# Altium PCB Nixie_Control.PcbDoc
Units mil, origin at the board's own origin, x right, y up, seen from the top; angles counter-clockwise.
Board outline 6299.21 x 1771.65 mil, 2 copper layers (Power, GND), stack 21 mil thick; 26 components, 73 nets, 202 pads, 27 vias.
Unrouted connection lines stored in the file: 13.
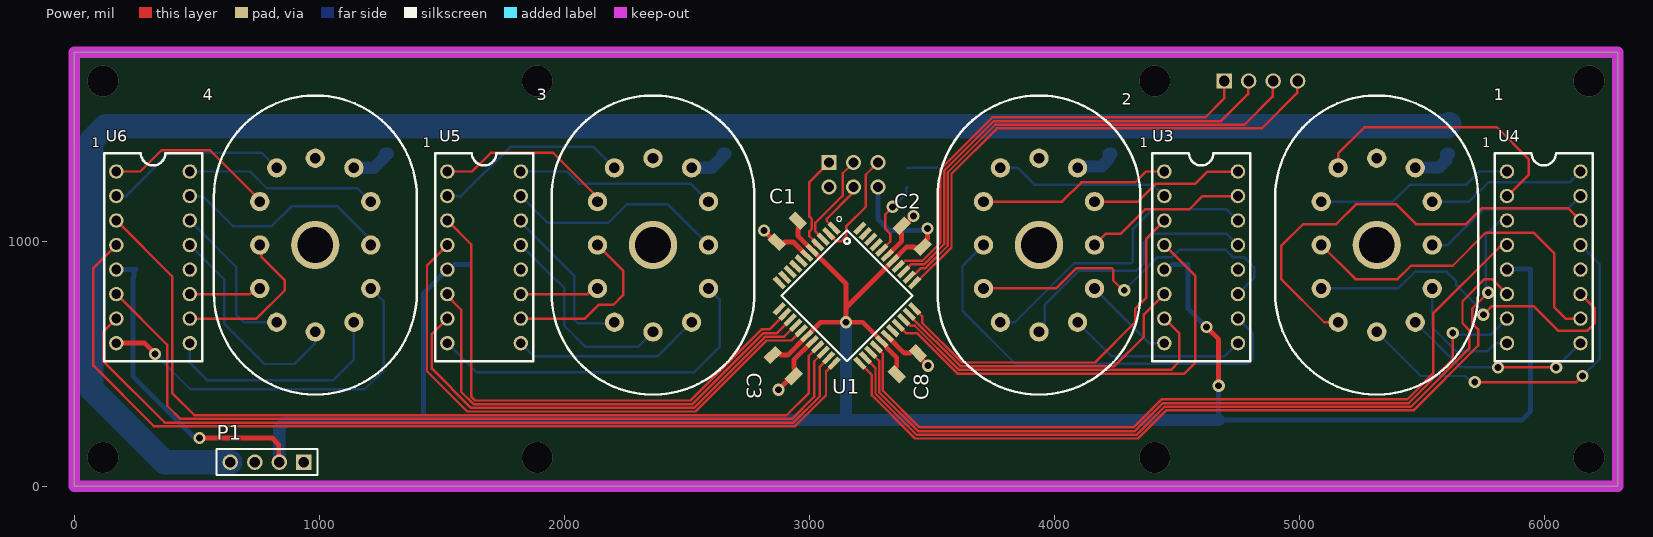
[diagram p0: Power view]
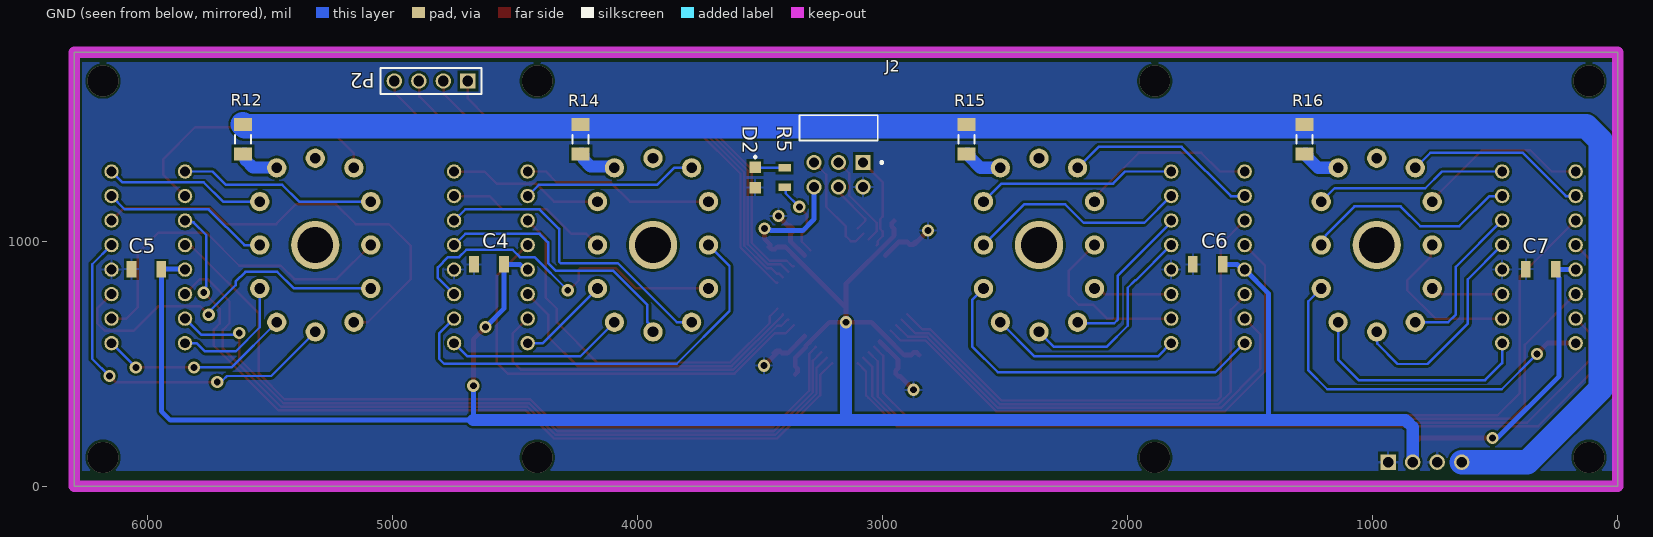
[diagram p1: GND view, seen from below]
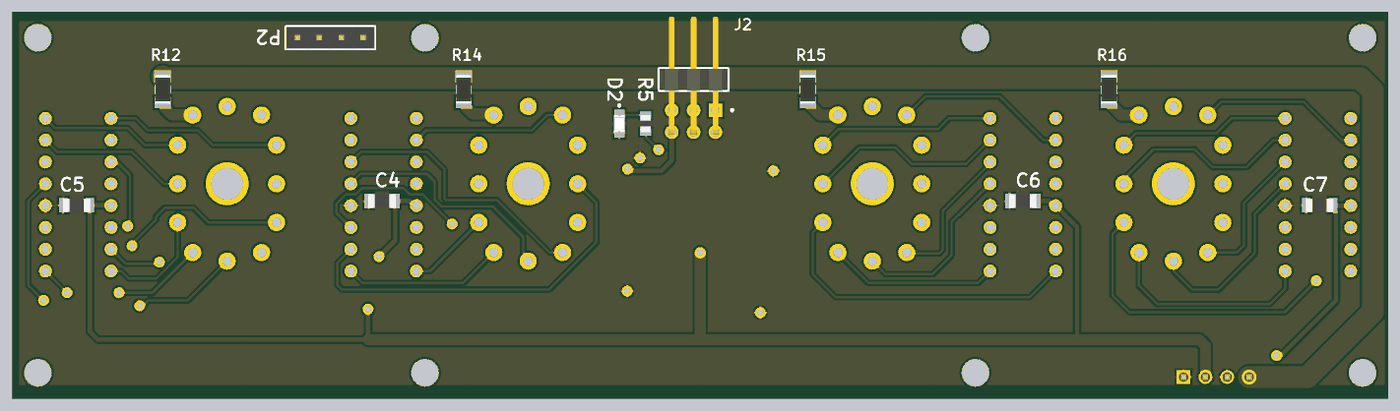
[diagram p2: 3D render of the assembled board from below, using the file's embedded part models]

## Layer stack, top to bottom
Top Solder: solder mask 0.4, Solder Resist, Dk 3.5
Power: signal copper 1.4
Dielectric 2: prepreg 2.8, PP-006, Dk 4.1
Dielectric 1: dielectric 12.6, FR-4, Dk 4.8
Dielectric 3: prepreg 2.8, PP-006, Dk 4.1
GND: signal copper 1.4
Bottom Solder: solder mask 0.4, Solder Resist, Dk 3.5

## Board outline
0,0 6299.21,0 6299.21,1771.65 0,1771.65

## Design rules (kind name [scope] priority, off if disabled: settings)
Clearance [All] p1: gap=10 ignorepadtopadclearanceinfootprint=FALSE except(0: Arc-Hole Track-Hole SMDPad-Hole THPad-Hole Via-Hole Fill-Hole Poly-Hole Region-Hole Text-Hole; 5: Arc-Arc Arc-Track Track-Track SMDPad-SMDPad; 7.87: Arc-SMDPad Arc-THPad Track-SMDPad Track-THPad; 19.68: THPad-THPad)
Height [All] p1: minheight=0 maxheight=1968.5 prefheight=500
HoleSize [All] p1: absolutevalues=TRUE maxlimit=248.03 minlimit=7.87 maxpercent=80.000 minpercent=20.000
MinimumSolderMaskSliver [All] p1: minsoldermaskwidth=5
PolygonConnect [All] p1: connectstyle=Relief reliefconductorwidth=10 reliefentries=4 polygonreliefangle="90 Angle" airgapwidth=10
RoutingVias [All] p1: holewidth=28 width=50 viastyle="Through Hole" minholewidth=28 minwidth=50 maxholewidth=28 maxwidth=50
SilkToSolderMaskClearance [IsPad] p1: minsilkscreentomaskgap=5 clearancetoexposedcopper=TRUE
SolderMaskExpansion [All] p1: expansion=1.97 istentingtop=FALSE
Width [All] p1: maxlimit=100 minlimit=10 preferedwidth=10
26 further rules are at their usual default settings.

## Classes and differential pairs
component class ATMega1284p: C1 C2 C3 C8 D2 P2 R5 U1
component class IN_12A: 1 2 3 4 C4 C5 C6 C7 R12 R14 R15 R16 U3 U4 U5 U6
component class Connectors: J2 P1

## Components (designator, comment, footprint, x,y, rotation, side; value= is the part's Value field where it differs from the comment)
1 "IN-12A" IN-12A 5314.96,984.25 r0 top locked
2 "IN-12A" IN-12A 3937.01,984.25 r0 top locked
3 "IN-12A" IN-12A 2362.2,984.25 r0 top locked
4 "IN-12A" IN-12A 984.25,984.25 r0 top locked
C1 "Capacitor - 0.1uF - 1206" FOOTPRINT-1206-GEN 2910,1040 r45 top value=0.1uF
C2 "Capacitor - 0.1uF - 1206" FOOTPRINT-1206-GEN 3420,1020 r315 top value=0.1uF
C3 "Capacitor - 0.1uF - 1206" FOOTPRINT-1206-GEN 2893.7,492.13 r135 top value=0.1uF
C4 "Capacitor - 0.1uF - 1206" FOOTPRINT-1206-GEN 4606.3,905.51 r180 bottom value=0.1uF
C5 "Capacitor - 0.1uF - 1206" FOOTPRINT-1206-GEN 6003.94,885.83 r180 bottom value=0.1uF
C6 "Capacitor - 0.1uF - 1206" FOOTPRINT-1206-GEN 1673.23,905.51 r180 bottom value=0.1uF
C7 "Capacitor - 0.1uF - 1206" FOOTPRINT-1206-GEN 314.96,885.83 r180 bottom value=0.1uF
C8 "Capacitor - 0.1uF - 1206" FOOTPRINT-1206-GEN 3400,500 r225 top value=0.1uF
D2 "LGR971-KN-1" FOOTPRINT-OSRAM-CHIPLED-0805-1A2K 3520,1260 r270 bottom
J2 "M20-9950345" FP-M20-9950345-MFG 3180,1460 r0 bottom
P1 "61300411121" 61300411121 787.4,98.43 r180 top
P2 "61300411121" 61300411121 4842.52,1653.54 r0 bottom locked
R5 "RMCF0805FT1K20" FOOTPRINT-0805-GEN 3400,1260 r270 bottom value=1.2k
R12 "Resistor 80k +/-1% 1206 250 mW" RESC3216X60X45ML15T20 5610.24,1416.34 r90 bottom value=80k
R14 "Resistor 80k +/-1% 1206 250 mW" RESC3216X60X45ML15T20 4232.28,1416.34 r90 bottom value=80k
R15 "Resistor 80k +/-1% 1206 250 mW" RESC3216X60X45ML15T20 2657.48,1416.34 r90 bottom value=80k
R16 "Resistor 80k +/-1% 1206 250 mW" RESC3216X60X45ML15T20 1279.53,1416.34 r90 bottom value=80k
U1 "ATMega-1284P" QFP80P1200X1200X120-44N 3153.7,777.32 r315 top locked
U3 "K155ID1" Socket_DIP_16 4448.82,1284.25 r0 top
U4 "K155ID1" Socket_DIP_16 5846.46,1284.25 r0 top
U5 "K155ID1" Socket_DIP_16 1523.07,1284.25 r0 top
U6 "K155ID1" Socket_DIP_16 172.44,1284.25 r0 top

## Footprints (in the part's own frame and the unit in brackets; to place one, negate y for a bottom-side part, rotate by r counter-clockwise, add the part's x,y. Pads: shape width x height; smd on the part's side, far side on the other; paste and mask are expansions set on the pad)
61300411121 [mm] "Pin Header, pitch 2.54 mm, THT, Vertical, single row, 4p"
  rect 1.6x1.6 hole 1.1: 1(-3.81,0)
  round 1.6 hole 1.1: 2(-1.27,0) 3(1.27,0) 4(3.81,0)
  silkscreen extent -5.23,-1.35 5.23,1.35, body extent -5.08,-1.27 5.08,1.27, height 8.57
FOOTPRINT-0805-GEN [mm] "1/8 Watt"
  rect 0.8x1.3 smd: 1(-1,0) 2(1,0)
  body extent -1,-0.6 1,0.6, height 0.71
FOOTPRINT-1206-GEN [mm] "1/4 Watt"
  rect 1x1.7 smd: 1(-1.55,0) 2(1.55,0)
  body extent -1.6,-0.8 1.6,0.8, height 0.71
FOOTPRINT-OSRAM-CHIPLED-0805-1A2K [mm] "Rectangle with Flat Top 1.30mm x 1.25mm"
  rect 1.2x1.2 smd: 1(-1.05,0) 2(1.05,0)
  silkscreen extent -2.1,0 -2.1,0, body extent -1.01,-0.62 0.99,0.63, height 0.8
FP-M20-9950345-MFG [mm]
  rect 1.57x1.57 hole 1.02 paste-1000 mask+0: 1(-2.54,3.53)
  round 1.57 hole 1.02 paste-1000 mask+0: 2(-2.54,6.07) 3(0,3.53) 4(0,6.07) 5(2.54,3.53) 6(2.54,6.07)
  silkscreen extent -4.61,-1.37 4.06,3.65, body extent -3.81,-7.37 3.81,6.39, height 5.28
IN-12A [mm]
  round 2 hole 1.1: 1(4,8) 2(5.75,4.5) 3(5.75,0) 4(5.75,-4.5) 5(4,-8) 6(0,-9) 7(-4,-8) 8(-5.75,-4.5) 9(-5.75,0) 10(-5.75,4.5) 11(-4,8) 12(0,9)
  round 5 hole 3.7: ""(0,0)
  silkscreen extent -10.51,-15.49 10.51,15.49, body extent -10,-15.24 10,15.24, height 28
QFP80P1200X1200X120-44N [mm]
  rect 1.5x0.5 smd: 1(-5.9,4) 2(-5.9,3.2) 3(-5.9,2.4) 4(-5.9,1.6) 5(-5.9,0.8) 6(-5.9,0) 7(-5.9,-0.8) 8(-5.9,-1.6) 9(-5.9,-2.4) 10(-5.9,-3.2) 11(-5.9,-4) 23(5.9,-4) 24(5.9,-3.2) 25(5.9,-2.4) 26(5.9,-1.6) 27(5.9,-0.8) 28(5.9,0) 29(5.9,0.8) 30(5.9,1.6) 31(5.9,2.4) 32(5.9,3.2) 33(5.9,4)
  rect 0.5x1.5 smd: 12(-4,-5.9) 13(-3.2,-5.9) 14(-2.4,-5.9) 15(-1.6,-5.9) 16(-0.8,-5.9) 17(0,-5.9) 18(0.8,-5.9) 19(1.6,-5.9) 20(2.4,-5.9) 21(3.2,-5.9) 22(4,-5.9) 34(4,5.9) 35(3.2,5.9) 36(2.4,5.9) 37(1.6,5.9) 38(0.8,5.9) 39(0,5.9) 40(-0.8,5.9) 41(-1.6,5.9) 42(-2.4,5.9) 43(-3.2,5.9) 44(-4,5.9)
  silkscreen extent -6.45,-4.8 4.8,5.3
RESC3216X60X45ML15T20 [mm] "Chip Resistor, 2-Leads, Body 3.3x1.75mm, IPC Low Density"
  rect 1.35x1.85 smd: 1(-1.525,0) 2(1.525,0)
  silkscreen extent -0.45,-0.82 0.45,0.82, body extent -1.65,-0.87 1.65,0.87, height 0.6
Socket_DIP_16 [mm]
  round 1.5 hole 1: 1(0,0) 2(0,-2.54) 3(0,-5.08) 4(0,-7.62) 5(0,-10.16) 6(0,-12.7) 7(0,-15.24) 8(0,-17.78) 9(7.62,-17.78) 10(7.62,-15.24) 11(7.62,-12.7) 12(7.62,-10.16) 13(7.62,-7.62) 14(7.62,-5.08) 15(7.62,-2.54) 16(7.62,0)
  silkscreen extent -1.27,-19.68 8.89,1.91

## Part data
C1 C2 C3 C4 C5 C6 C7 C8: library part CMP-001-00096-1, "CAP CER 0.1UF 50V X7R 1206", Part Number=1276-7034-1-ND, Design Item ID=Capacitor-Generic-1206, LatestRevisionNote="Re-released for DXP Platform.", PackageDescription="Radial Cap, Thru-Hole; 2 Leads; 0.3 in Pin Spacing", PackageReference=RAD-0.3, Published=8-Jun-2000, Publisher="Altium Limited", Source=Generic.SchLib, Type=Capacitor
D2: library part CMP-017-000003-2, "LED Uni-Color Green 572nm 2-Pin Chip 0805(2012Metric) T/R", Current - Maximum=25mA, Current - Test=20mA, Forward Voltage=2.2V, Part Number=475-1410-1-ND, Design Item ID=LED-OSRAM-LG-R971-KN-1, Source=Discrete.SchLib
J2: library part CMP-15831-000002-1, "CONN HEADER R/A 6POS 2.54MM", Current Rating=3A, Manufacturer=Harwin, Package=0, Temperature="-40°C to +105°C", Temperature Range High=+105°C, Temperature Range Low=-40°C, Automotive=No, Category=Conn, ComponentLink2Description=Datasheet, ComponentLink2URL=https://cdn.harwin.com/pdfs/M20-995.pdf, Conn Gender=Male, Conn Orientation="Right Angle", Contact Material=Gold,Nickel, Device Class L1=Connectors, Device Class L2="Headers and Wire Housings", Device Class L3=unset, Digikey Description="CONN HEADER R/A 6POS 2.54MM", Height=5.28mm, Ipc Land Pattern Name=DFN400X400X80-14, Lead Free=Yes, Manufacturer Part Number=M20-9950345, Mouser Description="Headers & Wire Housings 03+03 DIL HORIZONTAL PIN HEADER GOLD HT", Number Of Contacts=6, Number Of Rows=2, Octopart=https://octopart.com/m20-9950345-harwin-21265213, Pitch=2.54mm, RoHS=TRUE
P1 P2: library part CMP-1502-01064-1, "THT Vertical Pin Header WR-PHD, Pitch 2.54 mm, Single Row, 4 pins", Contact Resistance=20mOhm, Manufacturer="Wurth Elektronik", Operating Temperature=-40to105degC, Rated Current=3A, Withstanding Voltage=500VAC, Working Voltage=250VAC, Datasheet URL=https://katalog.we-online.de/em/datasheet/6130xx11121.pdf, Gender=Male, Manufacturer URL=http://www.we-online.de, Mounting Technology=THT, Orientation=Vertical, Package Reference=61300411121, Packaging=Bag, Part Number=61300411121, Pin Number=4, Pitch=2.54mm, Publisher=WurthElektronik, Row Number=Single
R5: library part CMP-009-00185-2, "Res Thick Film 0805 1.2K Ohm 1% 0.125W ±100ppm/°C Molded SMD Paper T/R", Design Item ID=Resistor-Generic-0805-2012, Source=Generic.SchLib, Type=Resistor
R12 R14 R15 R16: library part CMP-009-00016-4, "Chip Resistor, 80 KOhm, +/- 1%, 0.25 W, -55 to 155 degC, 1206 (3216 Metric)", Case/Package=1206, Max Operating Temperature=155°C, Min Operating Temperature=-55°C, Power=250mW, Tolerance=1%, Voltage Rating=200V, Mounting Technology=SM, Pins=2, RoHS Compliant=True

## Via types
v1: diameter 50, hole 28, Power to GND, 19 vias
v2: diameter 125.98, hole 125.89, Power to GND, 8 vias

## Nets (pads, with @x,y where several pads share a name; then routed paths per layer and width w, separated by ;. In a path a pad name is that pad's centre, name@x,y a point inside that pad or via, vN(x,y) a via of type N, cw(c..) or ccw(c..) an arc to the next point about the centre after c; other vN are vias at no path point)
+5V: C1.2 C2.2 C3.2 C4.2 C5.2 C6.2 C7.2 C8.2 J2.6 P1.2 U1.5 U1.17 U1.27 U1.38 U3.5 U4.5 U5.5 U6.5 | length 11250.3
  Power w20: v1(511.81,196.85) 808.15,196.85 835,170 835,100.83 P1.2 ; C3.2 2860.29,545.02 2873.99,545.02 2883.73,535.28 2911.65,535.28 U1.17 3045.67,669.29 v1(3149.61,669.29) ; C1.2 2962.89,1073.41 2962.89,1059.71 2953.15,1049.97 2953.15,1022.42 3149.61,825.96 3149.61,728.69 ; C8.2 3347.11,466.59 3347.11,480.29 3356.85,490.03 3356.85,524.29 3313.68,567.46 3313.68,572.58 3295.68,590.58 3295.68,591.03 3217.41,669.29 v1(3149.61,669.29) ; C2.2@3460.16,979.84 3460.16,987.55 3482.45,1009.84 v1(3482.45,1051.63) ; C2.2 3453.41,967.11 3439.71,967.11 3429.97,976.85 3397.77,976.85 U1.38 3149.61,728.69 ; v1(4620,650) 4670,600 v1(4670,410) ; v1(3149.61,669.29) 3149.61,728.69
  GND w20: U6.5 252.36,884.25 C7.2 244.25,876.14 244.25,854.9 240,850.65 240,448.98 v1@492.13,196.85 ; 1430,270 1425,275 1425,786.18 U5.5 1533.06,884.25 1554.32,905.51 C6.2 ; J2.6 3280,1090.08 3326.77,1043.31 3455.73,1043.31 3458.31,1045.89 3476.71,1045.89 v1(3482.45,1051.63) ; U3.5 4458.8,884.25 4480.06,905.51 C4.2 4545.28,724.72 v1(4620,650) ; v1(4670,410) 4670,270 5906.48,270 5942.91,306.43 C5.2 5848.03,885.83 U4.5
  GND w50: P1.2 837.4,240.71 863.16,266.46 ; 866.69,270 1430,270 4670,270 ; 3148.97,275 3149.61,275.64 v1(3149.61,669.29)
GND: C1.1 C2.1 C3.1 C4.1 C5.1 C6.1 C7.1 C8.1 D2.2 J2.2 P1.1 P1.3 U1.6 U1.18 U1.28 U1.39 U3.12 U4.12 U5.12 U6.12 | length 971
  Power w20: v1(2814.96,1043.31) C1.1@2870.24,988.03 ; C1.1 2876.59,987.11 2890.29,987.11 2900.03,996.85 2934.17,996.85 U1.6 ; v1(2874.02,393.7) 2929.29,448.98 C3.1 2946.59,458.72 2946.59,472.42 2936.85,482.16 2936.85,515.93 U1.18 ; U1.28 3387.87,543.15 3409.97,543.15 3419.71,552.89 3433.41,552.89 C8.1 ; U1.39 3376.85,1000.47 3376.85,1029.97 3367.11,1039.71 3367.11,1053.41 C2.1 ; C2.1@3369.92,1047.09 v1(3425.2,1102.36) ; C8.1@3428.98,547.4 v1(3484.25,492.13)
HV+: P1.4 R12.2 R14.2 R15.2 R16.2 | length 7269.7
  GND w100: P1.4 370.08,98.43 70.87,397.64 70.87,1409.93 129.44,1468.5 5602.36,1468.5 R12.2
Net1_1: 1.1 R12.1 | length 176
  GND w50: 1.1 5473.79,1300.56 5569.53,1300.56 5598.82,1329.85 5598.82,1354.72 5600.39,1356.3 R12.1
Net1_2: 1.2 U4.16 | length 656
  GND w10: 1.2 5691.42,1161.42 5770,1240 6102.2,1240 U4.16
Net1_3: 1.3 U4.15 | length 688
  GND w10: 1.3 5604.25,984.25 5750,1130 6092.2,1130 U4.15
Net1_4: 1.4 U4.8 | length 518.3
  GND w10: 1.4 5541.34,648.66 5639.59,550.41 5765.41,550.41 5799.25,584.25 U4.8
Net1_5: 1.5 U4.9 | length 791.5
  Power w10: v1(5810,485) v1(6047.2,485)
  GND w10: 1.5 5656.73,485 v1(5810,485) ; v1(6047.2,485) U4.9
Net1_6: 1.6 U4.13 | length 1531.1
  Power w10: v1(5715,425) 6130,425 v1(6155,450)
  GND w10: 1.6 5494.88,450 5675,450 5692.35,432.65 5707.35,432.65 v1(5715,425) ; U4.13 6225,905.71 6225,520 v1(6155,450)
Net1_7: 1.7 U4.14 | length 1813.2
  Power w10: 1.7 5100.71,669.29 4925,845 4925,980 5015,1070 5150,1070 5230,1150 5395,1150 5475,1070 5680,1070 5745,1135 6095.71,1135 U4.14
Net1_8: 1.8 U4.11 | length 1443.5
  Power w10: v1(5750,700) 5785,735 5955,735 6055,635 6175,635 6205,665 6205,725.71 U4.11
  GND w10: 1.8 5402.09,807.09 5470,875 5600,875 5640,835 5640,820 5750,710 v1(5750,700)
Net1_9: 1.9 U4.10 | length 1468.4
  Power w10: 1.9 5227.83,845 5400,845 5455,900 5625,900 5760,1035 5955,1035 6040,950 6040,730 6085.75,684.25 U4.10
Net1_10: 1.10 U4.1 | length 808.8
  GND w10: 1.10 5381.42,1161.42 5450,1230 5680,1230 5734.25,1284.25 U4.1
Net1_11: 1.11 U4.2 | length 1123.2
  Power w10: 1.11 5157.48,1357.48 5265,1465 5805,1465 5935,1335 5935,1270 5849.25,1184.25 U4.2
Net2_1: 2.1 R14.1 | length 173.6
  GND w50: 2.1 4099.99,1304.71 4191.58,1304.71 4220.87,1334 4220.87,1354.72 4222.44,1356.3 R14.1
Net2_2: 2.2 U3.16 | length 636.2
  Power w10: 2.2@4163.45,1161.35 4341.35,1161.35 4415,1235 4575,1235 4624.19,1284.19 U3.16
Net2_3: 2.3 U3.15 | length 668.3
  Power w10: 2.3 4209.13,1030 4270,1030 4370,1130 4550,1130 4604.25,1184.25 U3.15
Net2_4: 2.4 U3.8 | length 377.7
  GND w10: 2.4 4386.22,584.25 U3.8
Net2_5: 2.5 U3.9 | length 734.5
  GND w10: 2.5 4233.78,530 4694.57,530 U3.9
Net2_6: 2.6 U3.13 | length 1097
  GND w10: 2.6 3937.01,647.16 3960,670.15 3960,740 4100,880 4334.49,880 4365.07,910.59 4365.07,995.07 4400,1030 4703.07,1030 U3.13
Net2_7: 2.7 U3.14 | length 1257.7
  GND w10: 2.7 3839.29,669.29 4080,910 4314.14,910 4320,915.86 4320,1050 4400,1130 4703.07,1130 U3.14
Net2_8: 2.8 U3.11 | length 1443.5
  Power w10: 2.8 4007.09,807.09 4090,890 4234.14,890 4240,884.14 4240,840 4285,795 v1(4285,800)
  GND w10: v1(4285,800) 4420,935 4480,935 4510,965 4698.21,965 4728.21,935 4773.37,935 4815,893.37 4815,850.43 U3.11
Net2_9: 2.9 U3.10 | length 1776.4
  GND w10: 2.9 3625,898.62 3625,715 3840,500 4789.57,500 4810,520.43 4810,623.07 U3.10
Net2_10: 2.10 U3.1 | length 789.1
  Power w10: 2.10 4031.42,1161.42 4110,1240 4330,1240 4374.25,1284.25 U3.1
Net2_11: 2.11 U3.2 | length 716.9
  GND w10: 2.11 3850.79,1299.21 3920,1230 4403.07,1230 U3.2
Net3_1: 3.1 R15.1 | length 167.2
  GND w50: 3.1 2600.39,1299.21 2646.06,1344.88 2646.06,1354.72 2647.64,1356.3 R15.1
Net3_2: 3.2 U5.16 | length 816.4
  GND w10: U5.16 2010.75,1284.25 2060,1235 2515,1235 3.2
Net3_3: 3.3 U5.15 | length 910.5
  GND w10: U5.15 1932.32,1075 2180,1075 2255,1150 2422.83,1150 3.3
Net3_4: 3.4 U5.8 | length 1461.1
  GND w10: U5.8 1642.32,465 2530,465 2635,570 2635,760.67 3.4
Net3_5: 3.5 U5.9 | length 776.8
  GND w10: U5.9 1877.32,530 2380.39,530 3.5
Net3_6: 3.6 U5.13 | length 826.3
  GND w10: U5.13 1967.32,840 1970,840 2000,810 2000,655 2085,570 2302.28,570 3.6
Net3_7: 3.7 U5.14 | length 666.8
  GND w10: U5.14 1823.07,1076.93 2040,860 2040,680 2055,665 2200.43,665 3.7
Net3_8: 3.8 U5.11 | length 322.2
  Power w10: U5.11 2095.6,784.25 2118.43,807.09 3.8
Net3_9: 3.9 U5.10 | length 704
  Power w10: U5.10 2084.25,684.25 2140,740 2200,740 2240,780 2240,880.08 3.9
Net3_10: 3.10 U5.1 | length 736.8
  Power w10: U5.1 1624.25,1284.25 1700,1360 1955,1360 2135.83,1179.17 3.10
Net3_11: 3.11 U5.2 | length 800.3
  GND w10: U5.2 1579.25,1184.25 1780,1385 2118.94,1385 3.11
Net4_1: 4.1 R16.1 | length 167.2
  GND w50: 4.1 1222.44,1299.21 1268.11,1344.88 1268.11,1354.72 1269.69,1356.3 R16.1
Net4_2: 4.2 U6.16 | length 789.1
  GND w10: U6.16 717.75,1284.25 786,1216 1156.05,1216 4.2
Net4_3: 4.3 U6.15 | length 901.1
  GND w10: U6.15 524.75,1184.25 648,1061 806,1061 887,1142 1075,1142 1193.24,1023.76 1193.24,1020.24 1210.63,1002.85 4.3
Net4_4: 4.4 U6.8 | length 1557.7
  Power w20: U6.8 288.24,584.25 330,542.5 v1(330,540)
  GND w10: v1(330,540) 474,396 1186,396 1263,473 1263,754.72 4.4
Net4_5: 4.5 U6.9 | length 967
  GND w10: U6.9 472.44,502.56 542,433 1058,433 1141.73,516.73 4.5
Net4_6: 4.6 U6.13 | length 899.6
  GND w10: U6.13 612,844.69 612,664 777,499 899,499 981.41,581.41 981.41,627.08 4.6
Net4_7: 4.7 U6.14 | length 640.3
  GND w10: U6.14 661,895.69 661,701 692.71,669.29 4.7
Net4_8: 4.8 U6.11 | length 294.9
  Power w10: U6.11 717.65,784.25 740.48,807.09 4.8
Net4_9: 4.9 U6.10 | length 662.1
  Power w10: U6.10 744.25,684.25 860,800 860,840 764.26,935.74 764.26,977.87 4.9
Net4_10: 4.10 U6.1 | length 712.1
  Power w10: U6.1 270.25,1284.25 357,1371 555,1371 757.87,1168.13 4.10
Net4_11: 4.11 U6.2 | length 752.3
  GND w10: U6.2 212.25,1184.25 388,1360 765.98,1360 4.11
NetD2_1: D2.1 R5.1 | length 120.8
  GND w10: R5.1 3518.03,1299.37 D2.1
NetJ2_1: J2.1 U1.4 | length 388.5
  Power w10: U1.4@3023.85,983.85 3020,987.69 3020,1000 3000,1020 3000,1040 3010,1050 3010,1090 3000,1100 3000,1241.02 J2.1
NetJ2_3: J2.3 U1.3 | length 389.8
  Power w10: U1.3 3025,1039.65 3025,1075 3136.22,1186.22 3136.22,1277.24 J2.3
NetJ2_4: J2.4 U1.1 | length 225.6
  Power w10: U1.1 3071.01,1082.73 3071.01,1091.01 3170.09,1190.09 3170.09,1211.11 J2.4
NetJ2_5: J2.5 U1.2 | length 447.3
  Power w10: U1.2 3109.19,1000 3130,1000 3150,1020 3150,1060 3230,1140 3230,1271.02 J2.5
NetP2_1: P2.1 U1.37 | length 1860.9
  Power w10: U1.37 3368.22,897.03 3391.19,920 3461.36,920 3535,993.64 3535,1293.64 3746.36,1505 4615.24,1505 4692.52,1582.28 P2.1
NetP2_2: P2.2 U1.36 | length 1936.1
  Power w10: U1.36 3415,905 3467.57,905 3550,987.43 3550,1287.43 3752.57,1490 4680,1490 4790,1600 P2.2@4790,1654.75
NetP2_3: P2.3 U1.35 | length 2021.7
  Power w10: U1.35 3420.95,866.41 3431.41,866.41 3455,890 3473.79,890 3565,981.21 3565,1281.21 3758.79,1475 4775,1475 4890,1590 P2.3@4890,1647.48
NetP2_4: P2.4 U1.34 | length 2112.1
  Power w10: U1.34 3435.22,830.22 3580,975 3580,1275 3765,1460 4845.83,1460 4990,1604.17 P2.4@4990,1659.21
NetU1_13: U1.13 U5.3 | length 2191.1
  Power w10: U5.3 1620,987.32 1620,366.21 1636.21,350 2515,350 2805,640 2838.21,640 U1.13
NetU1_14: U1.14 U5.6 | length 1929
  Power w10: U5.6 1523.07,776.93 1580,720 1580,385 1630,335 2522.57,335 2812.27,624.69 2814.69,624.69 2815,625 2867.75,625 U1.14
NetU1_15: U1.15 U5.7 | length 1921.4
  Power w10: U5.7 1460,621.18 1460,480 1620,320 2528.79,320 2818.48,609.69 2824.69,609.69 2825,610 2897.29,610 U1.15
NetU1_16: U1.16 U5.4 | length 2281.3
  Power w10: U5.4 1440,901.18 1440,469.45 1604.45,305 2535,305 2824.69,594.69 2926.53,594.69 U1.16
NetU1_19: U1.19 U6.3 | length 3673.5
  Power w10: U6.3 400,856.69 400,381 491.16,289.84 2906.84,289.84 2998,381 2998,532.54 U1.19
NetU1_20: U1.20 U6.6 | length 3437.1
  Power w10: U6.6 380,576.69 380,328.66 433.82,274.84 2929.27,274.84 3020,365.58 3020,510 U1.20
NetU1_21: U1.21 U6.7 | length 3440.1
  Power w10: U6.7 118.11,629.92 118.11,511.81 370.08,259.84 2935.48,259.84 3043,367.36 3043,488.45 U1.21
NetU1_22: U1.22 U6.4 | length 3819.1
  Power w10: U6.4 78.74,890.55 78.74,492.13 326.02,244.84 2941.69,244.84 3058,361.15 3068,371.15 3068,468.91 U1.22
NetU1_23: U1.23 U4.3 | length 3457
  Power w10: U1.23 3255,453.31 3255,371.36 3431.36,195 4341.21,195 4455.57,309.36 5464.36,309.36 5728.51,573.51 5728.51,640.17 5705,663.68 5705,725 v1(5770,790)
  GND w10: v1(5770,790) 5762.35,797.65 5762.35,813.51 5760,815.86 5760,1025 5811.37,1076.37 5838.57,1076.37 U4.3
NetU1_24: U1.24 U4.6 | length 3248.7
  Power w10: U1.24 3270,482.85 3270,377.57 3437.57,210 4335,210 4345,220 4449.36,324.36 5454.36,324.36 5691.94,561.94 5691.94,638.06 5665,665 5665,755 5755,845 5785.71,845 U4.6
NetU1_25: U1.25 U4.7 | length 3062.5
  Power w10: U1.25 3285,512.4 3285,383.79 3443.79,225 4328.79,225 4338.79,235 4443.15,339.36 5445.57,339.36 5625,518.79 v1(5625,625)
  GND w10: v1(5625,625) 5632.61,617.39 5779.59,617.39 U4.7
NetU1_26: U1.26 U4.4 | length 3249.9
  Power w10: U1.26 3273.41,567.03 3300,540.44 3300,390 3450,240 4322.57,240 4332.57,250 4436.94,354.36 5439.36,354.36 5545,460 5545,705 5814.87,974.87 5837.07,974.87 U4.4
NetU1_30: U1.30 U3.4 | length 1844.5
  Power w10: U1.30 3395.11,625 3438.79,625 3603.79,460 3610,460 4530,460 4575,505 4575,858.07 U3.4
NetU1_31: U1.31 U3.7 | length 1424.2
  Power w10: U1.31 3388.57,679.89 3413.46,655 3430,655 3610,475 3635,475 4475,475 4510,510 4510,623.07 U3.7
NetU1_32: U1.32 U3.6 | length 1306.3
  Power w10: U1.32 3407.03,699.18 3616.21,490 3641.21,490 4245,490 4365,610 4365,700.43 U3.6
NetU1_33: U1.33 U3.3 | length 1538.8
  Power w10: U1.33 3460,693.73 3460,667.43 3622.43,505 4165,505 4330,670 4330,725 4375,770 4375,1010.43 U3.3
Stat_LED: R5.2 U1.40 | length 316.6
  Power w10: U1.40 3330,998.16 3330,1030 3310,1050 3310,1110 v1(3340,1140)
  GND w10: v1(3340,1140) 3395.74,1195.74 3395.74,1216.37 R5.2
pads on no net: 1. 1.12 2. 2.12 3. 3.12 4. 4.12 U1.7 U1.8 U1.9 U1.10 U1.11 U1.12 U1.29 U1.41 U1.42 U1.43 U1.44
copper on no net:
  other v2: 118.11,118.11 1889.76,118.11 4409.45,118.11 6181.1,118.11 118.11,1653.54 1889.76,1653.54 4409.45,1653.54 6181.1,1653.54

## Polygon pours and split planes (outlines as drawn)
GND on GND "GND" (solid, pour order 54): 15.89,62.58 15.89,1729.9 6265.89,1729.9 6265.89,62.58

## Keep-outs
Keep-Out Layer:
  the board outline again, w47.24

## Silkscreen, mask and mechanical layers (free items; w line width, h text height)
Mechanical 1:
  the board outline again, w47.24

## Text inside footprints (layer, text, board x,y; h text height)
U3: Top Overlay "1" at 4348.82,1384.25 h39.37
U4: Top Overlay "1" at 5746.46,1384.25 h39.37
U5: Top Overlay "1" at 1423.07,1384.25 h39.37
U6: Top Overlay "1" at 72.44,1384.25 h39.37